# EAGLE board yellowstone-walach-aerospace-cubesat-brd (EAGLE 9.7.0)
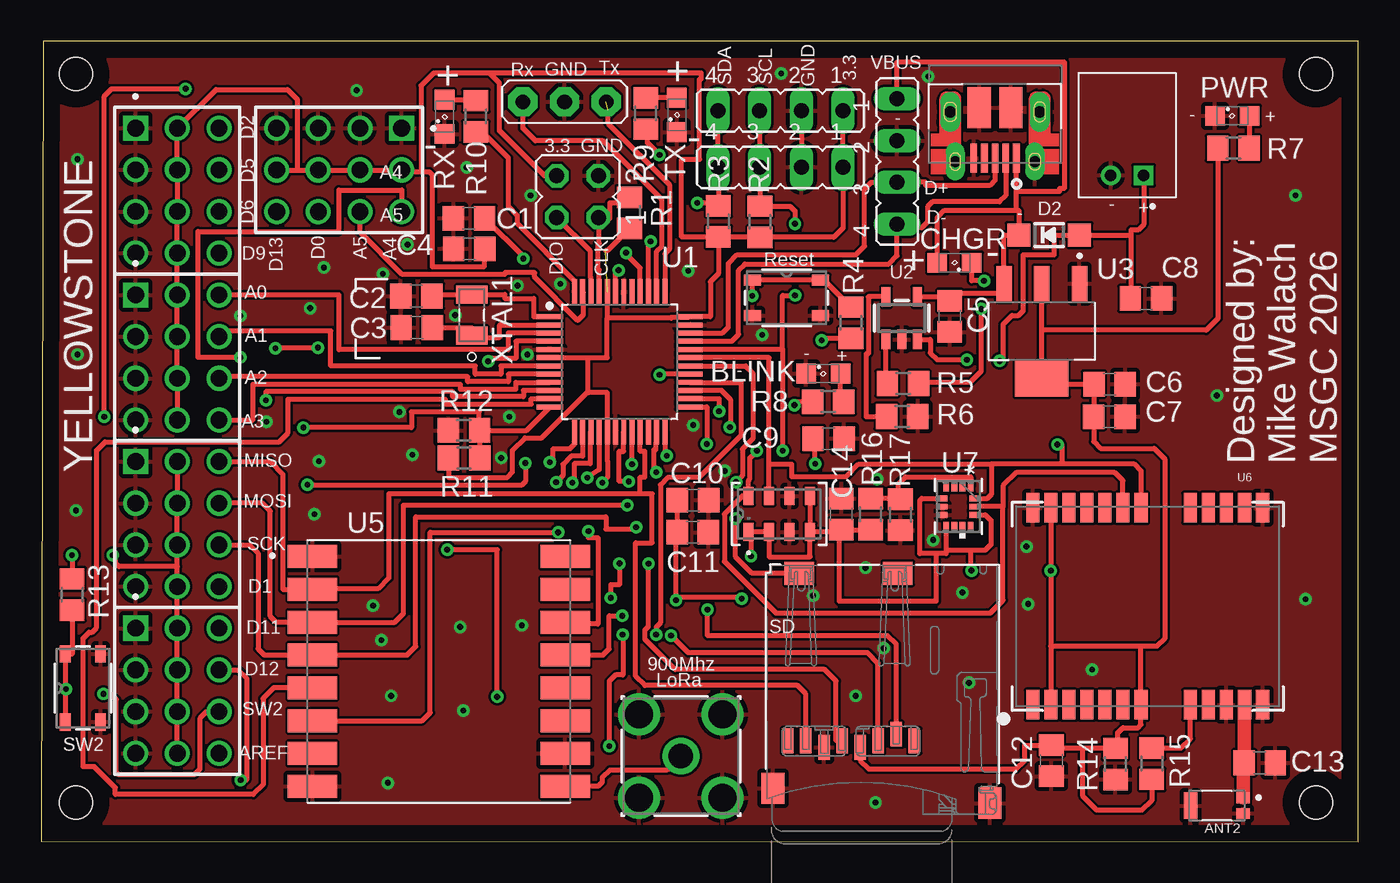
[diagram p0: board, top side]
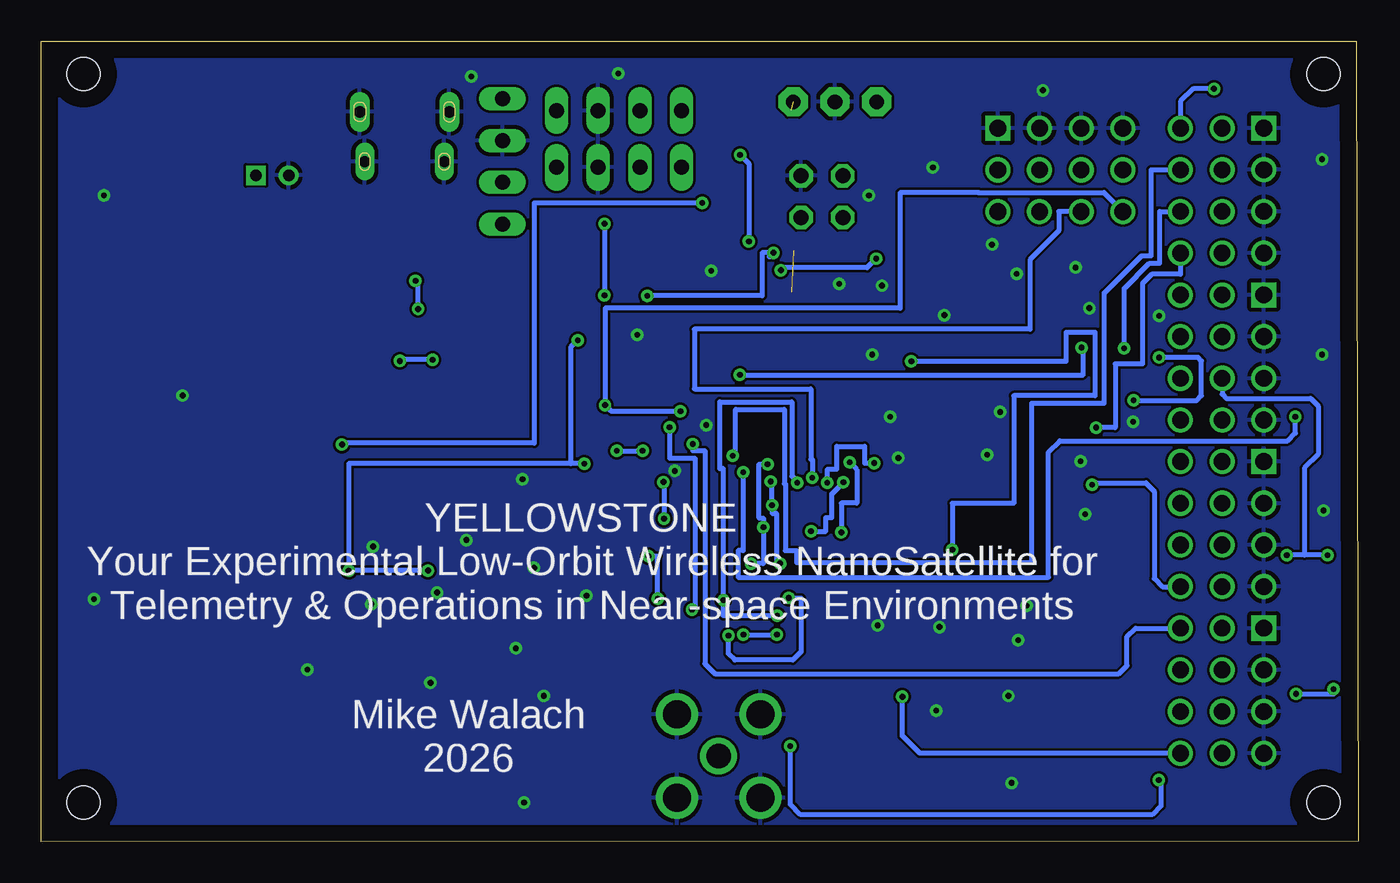
[diagram p1: board, bottom side, seen from below]

Size 80.25 x 48.8 mm. Coordinates in mm from the lower left corner, seen from the top.
Outline: 0,0.03 80.23,0 80.25,48.8 0.13,48.8 0,0.03
Copper layers (1*16): Top 0.035mm / dielectric 1.5mm / Bottom 0.035mm
Design rules "Fusion Electronics Design Rules": minimum track width 6mil, minimum drill 0.35mm, track to track 6mil, track to pad 6mil, pad to pad 6mil, via to via 6mil, smd to smd 6mil, copper to edge 40mil, drill to drill 6mil, minimum pad ring 10mil, minimum via ring 8mil, stop-mask expansion 4mil, vias tented up to drill 0mil, thermal gap 10mil
Holes 2 mm at 2.13,46.78 2.14,2.42 77.65,2.42 77.65,46.78

## Footprints (pad centres in the part's own frame; a part is rotated, then mirrored left to right if it is on the bottom)
XDCR_W3011 = smd 0.65 x 0.8: 1 -0.475,1.6; 2 0.475,1.6 | smd 1.6 x 0.8: 3 0,-1.6
132134_AMP = drill 1.499 pad 2.007: 1 0,0 | drill 1.702 pad 2.21: 2 -2.54,2.54; 3 -2.54,-2.54; 4 2.54,-2.54; 5 2.54,2.54
SML0805 = smd 1.2 x 1.2: A 1.05,0; C -1.05,0
C0805 = smd 1.3 x 1.5: 1 -0.95,0; 2 0.95,0
MICROBUILDER_SOD-123 = smd 1.4 x 1.4: A 1.85,0; C -1.85,0
TSW-104-07-F-T_SAMTEC_TSW-104-07-F-T = drill 1.02 pad 1.37 square: 01 -3.81,-2.54 | drill 1.02 pad 1.37: 02 -3.81,0; 03 -3.81,2.54; 04 -1.27,-2.54; 05 -1.27,0; 06 -1.27,2.54; 07 1.27,-2.54; 08 1.27,0; 09 1.27,2.54; 10 3.81,-2.54; 11 3.81,0; 12 3.81,2.54
S2B-PH-K-S(LF)(SN) = drill 0.7 square: 1 -1,0 | drill 0.7: 2 1,0
JP4 = drill 0.914 long: 1 -3.81,0; 2 -1.27,0; 3 1.27,0; 4 3.81,0
3-PIN-JUMPER = drill 0.9 pad 1.778 octagon: 1 0,2.54; 2 0,0; 3 0,-2.54
JP2Q = drill 0.914 octagon: 1 -1.27,-1.27; 2 -1.27,1.27; 3 1.27,-1.27; 4 1.27,1.27
10103594 = smd 0.4 x 1.75: 1 -1.3,2.825; 2 -0.65,2.825; 3 0,2.825; 4 0.65,2.825; 5 1.3,2.825 | smd 1.425 x 2.5: 6 -0.963,-0.25; 7 0.963,-0.25 | drill 0.65 pad 0.73 long: SH1 -2.425,3.03; SH2 2.425,3.03 | drill 0.7 long: SH3 -2.725,0; SH4 2.725,0
R0805 = smd 1.3 x 1.5: 1 -0.95,0; 2 0.95,0
MICROBUILDER_MICROSD = smd 0.7 x 1.5: 1 9,-10.64; 2 7.9,-10.24; 3 6.8,-10.64; 4 5.7,-11.04; 5 4.6,-10.64; 6 3.5,-11.04; 7 2.4,-10.64; 8 1.3,-10.64 | smd 1.8 x 1.4: CD1 2,-0.44; CD2 8,-0.44 | smd 1.4 x 1.9: MT1 0.4,-13.54; MT2 13.6,-14.44
PTS810 = smd 1.041 x 0.66: 1 -2.075,1.075; 2 2.075,1.075; 3 -2.075,-1.075; 4 2.075,-1.075
QFP50P900X900X120-48 = smd 1.6 x 0.3: 1 -4.25,2.75; 2 -4.25,2.25; 3 -4.25,1.75; 4 -4.25,1.25; 5 -4.25,0.75; 6 -4.25,0.25; 7 -4.25,-0.25; 8 -4.25,-0.75; 9 -4.25,-1.25; 10 -4.25,-1.75; 11 -4.25,-2.25; 12 -4.25,-2.75; 25 4.25,-2.75; 26 4.25,-2.25; 27 4.25,-1.75; 28 4.25,-1.25; 29 4.25,-0.75; 30 4.25,-0.25; 31 4.25,0.25; 32 4.25,0.75; 33 4.25,1.25; 34 4.25,1.75; 35 4.25,2.25; 36 4.25,2.75 | smd 0.3 x 1.6: 13 -2.75,-4.25; 14 -2.25,-4.25; 15 -1.75,-4.25; 16 -1.25,-4.25; 17 -0.75,-4.25; 18 -0.25,-4.25; 19 0.25,-4.25; 20 0.75,-4.25; 21 1.25,-4.25; 22 1.75,-4.25; 23 2.25,-4.25; 24 2.75,-4.25; 37 2.75,4.25; 38 2.25,4.25; 39 1.75,4.25; 40 1.25,4.25; 41 0.75,4.25; 42 0.25,4.25; 43 -0.25,4.25; 44 -0.75,4.25; 45 -1.25,4.25; 46 -1.75,4.25; 47 -2.25,4.25; 48 -2.75,4.25
MICROBUILDER_SOT23-5 = smd 0.55 x 1.2: 1 -0.95,-1.3; 2 0,-1.3; 3 0.95,-1.3; 4 0.95,1.3; 5 -0.95,1.3
VREG_TLV1117LV33DCYR = smd 2.15 x 0.95: 1 -2.9,2.3; 2 -2.9,0; 3 -2.9,-2.3 | smd 2.15 x 3.25: 4 2.9,0
SON8_MS5611_TEC = smd 1.092 x 0.61: 1 -1.1,1.875; 2 -1.1,0.625; 3 -1.1,-0.625; 4 -1.1,-1.875; 5 1.1,-1.875; 6 1.1,-0.625; 7 1.1,0.625; 8 1.1,1.875
XCVR_RFM95W-915S2 = smd 3 x 1.4: 1 -7.7,7; 2 -7.7,5; 3 -7.7,3; 4 -7.7,1; 5 -7.7,-1; 6 -7.7,-3; 7 -7.7,-5; 8 -7.7,-7; 9 7.7,-7; 10 7.7,-5; 11 7.7,-3; 12 7.7,-1; 13 7.7,1; 14 7.7,3; 15 7.7,5; 16 7.7,7
GPS_NEO-M9N = smd 1.8 x 0.8: 1 6,-7; 2 6,-5.9; 3 6,-4.8; 4 6,-3.7; 5 6,-2.6; 6 6,-1.5; 7 6,-0.4; 8 6,2.6; 9 6,3.7; 10 6,4.8; 11 6,5.9; 12 6,7; 13 -6,7; 14 -6,5.9; 15 -6,4.8; 16 -6,3.7; 17 -6,2.6; 18 -6,-0.4; 19 -6,-1.5; 20 -6,-2.6; 21 -6,-3.7; 22 -6,-4.8; 23 -6,-5.9; 24 -6,-7
LGA-14L_2P5X3X0P83_STM-L = smd 0.577 x 0.351: 1 -1.21,0.75; 2 -1.21,0.25; 3 -1.21,-0.25; 4 -1.21,-0.75; 8 1.21,-0.75; 9 1.21,-0.25; 10 1.21,0.25; 11 1.21,0.75 | smd 0.351 x 0.577: 5 -0.5,-0.956; 6 0,-0.956; 7 0.5,-0.956; 12 0.5,0.956; 13 0,0.956; 14 -0.5,0.956
XTAL_ABS07-32.768KHZ-T = smd 1.1 x 1.9: 1 -1.25,0; 2 1.25,0

## Placement (x,y rotation side)
ANT2  W3011  [XDCR_W3011]  71.62,2.22 270 top
ANT-1  132134132134_AMP  [132134_AMP]  38.98,5.23 0 top
BLINK  [SML0805]  47.66,28.54 0 top
C1  1uF  [C0805]  26.07,38 180 top
C2  22pF  [C0805]  22.86,33.26 180 top
C3  22pF  [C0805]  22.89,31.34 180 top
C4  1uF  [C0805]  26.08,36.14 180 top
C5  1uF  [C0805]  55.35,32.02 270 top
C6  1uF  [C0805]  65.09,27.89 0 top
C7  10uF  [C0805]  65.08,25.92 0 top
C8  10uF  [C0805]  67.31,33.11 0 top
C9  0.1uF  [C0805]  47.97,24.57 0 top
C10  0.1uF  [C0805]  39.72,20.83 0 top
C11  10uF  [C0805]  39.7,18.87 0 top
C12  0.1uF  [C0805]  61.55,4.96 270 top
C13  2.2pF  [C0805]  74.24,4.82 0 top
C14  0.1uF  [C0805]  48.74,19.97 90 top
CHGR  [SML0805]  55.65,35.28 180 top
D2  [MICROBUILDER_SOD-123]  61.41,36.98 0 top
J1  3X4_MALE_HEADER  [TSW-104-07-F-T_SAMTEC_TSW-104-07-F-T]  8.3,29.52 270 top
J2  3X4_MALE_HEADER  [TSW-104-07-F-T_SAMTEC_TSW-104-07-F-T]  18.16,40.95 180 top
J3  S2B-PH-K-S(LF)(SN)  [S2B-PH-K-S(LF)(SN)]  66.17,40.62 180 top
J4  3X4_MALE_HEADER  [TSW-104-07-F-T_SAMTEC_TSW-104-07-F-T]  8.3,19.37 270 top
J5  3X4_MALE_HEADER  [TSW-104-07-F-T_SAMTEC_TSW-104-07-F-T]  8.3,39.68 270 top
J6  3X4_MALE_HEADER  [TSW-104-07-F-T_SAMTEC_TSW-104-07-F-T]  8.3,9.22 270 top
JP2  [JP4]  45.05,44.56 180 top
JP3  [JP4]  45.05,41.11 180 top
JP4  [JP4]  52.15,41.46 270 top
JP5  3-PIN-JUMPER  [3-PIN-JUMPER]  31.89,45.09 270 top
JP6  [JP2Q]  32.69,39.32 90 top
MICRO-USB-B  10103594  [10103594]  58.11,44.48 180 top
PWR  [SML0805]  72.57,44.24 0 top
R1  1K  [R0805]  35.85,38.33 90 top
R2  10K  [R0805]  43.8,37.79 270 top
R3  10K  [R0805]  41.26,37.81 270 top
R4  1K  [R0805]  49.33,31.64 270 top
R5  1K  [R0805]  52.51,27.93 0 top
R6  10K  [R0805]  52.45,25.92 0 top
R7  2.2K  [R0805]  72.64,42.27 0 top
R8  2.2K  [R0805]  47.96,26.83 0 top
R9  2.2K  [R0805]  36.83,44.38 90 top
R10  2.2K  [R0805]  26.49,44.21 90 top
R11  2.2K  [R0805]  25.77,23.4 0 top
R12  2.2K  [R0805]  25.77,25.08 180 top
R13  1K  [R0805]  1.89,15.08 90 top
R14  100K  [R0805]  65.45,4.76 90 top
R15  1K  [R0805]  67.66,4.77 270 top
R16  1K  [R0805]  50.53,19.97 270 top
R17  1K  [R0805]  52.35,19.94 90 top
RX  [SML0805]  24.59,44.18 90 top
SD  [MICROBUILDER_MICROSD]  44.19,16.81 0 top
SW1  PTS810SJG250SMTRLFSPTS810  [PTS810]  45.42,33.15 0 top
SW2  PTS810SJG250SMTRLFSPTS810  [PTS810]  2.55,9.38 90 top
TX  [SML0805]  38.73,44.3 90 top
U1  ATSAMD21G  [QFP50P900X900X120-48]  35.25,29.26 0 top
U2  [MICROBUILDER_SOT23-5]  52.43,31.92 0 top
U3  TLV1117LV33DCYR  [VREG_TLV1117LV33DCYR]  60.96,31.11 270 top
U4  MS560702BA03-50SON8_MS5611_TEC  [SON8_MS5611_TEC]  44.97,19.98 90 top
U5  RFM95W-915S2  [XCVR_RFM95W-915S2]  24.23,10.39 0 top
U6  GPS_U-BLOX_NEO-M9N  [GPS_NEO-M9N]  67.41,14.36 270 top
U7  LSM6DSO32TRLGA-14L_2P5X3X0P83_STM-L  [LGA-14L_2P5X3X0P83_STM-L]  55.88,20.43 270 top
XTAL1  32.768kHz  [XTAL_ABS07-32.768KHZ-T]  26.24,32.1 90 top

## Library data of the parts
ANT2 = W3011; MANUFACTURER: PulseLarsen; MAXIMUM_PACKAGE_HEIGHT: 1.3 mm; PARTREV: N/A; STANDARD: Manufacturer recommendations
ANT-1 = 2025-03-19_02-22-58_Library; COPYRIGHT: Copyright (C) 2025 Ultra Librarian. All rights reserved.; MANUFACTURER_PART_NUMBER: 132134; MFR_NAME: Amphenol ICC
BLINK CHGR PWR RX TX = led
C1-C14 = rcl; SPICEPREFIX: C
D2 SD U2 = flightcomputer-2023
J1 J2 J4-J6 = BOBCAT_Library; MANUFACTURER: Samtec; PARTREV: R; STANDARD: Manufacturer Recommendations
J3 = Connectors; CREATED_BY: PCBLayout.com; DIGI_KEY_PART_NUMBER: 455-1719-ND; MANUFACTURER: JST Sales America Inc.; MPN: S2B-PH-K-S(LF)(SN)
JP2-JP4 JP6 = jumper
JP5 = walach
MICRO-USB-B = Connector_USB; CATEGORY: Connectors; CONTACTS: 5; CURRENT-RATING: 1.8A; DESCRIPTION: CONN RCPT USB2.0 MICRO B SMD R/A; GENDER: Receptacle; MANUFACTURER: Amphenol ICC (FCI); MOUNT_TYPE: R/A; MPN: 10103594-0001LF; OPERATING_TEMPERATURE: -30°C ~ 80°C; PART_STATUS: ACTIVE; ROHS_COMPLIANT: COMPLIANT; SUB_CATEGORY: USB; TYPE: USB-micro B; VOLTAGE-RATING: 100VAC
R1-R17 = rcl; SPICEPREFIX: R
SW1 SW2 = 2024-06-17_17-27-14_Library; COPYRIGHT: Copyright (C) 2024 Ultra Librarian. All rights reserved.; MANUFACTURER_PART_NUMBER: PTS810SJG250SMTRLFS; MFR_NAME: C&K Components
U1 = IC_Embedded; CATEGORY: IC_Embedded; CORE: ARM Cortex M0+; DESCRIPTION: Low-power, high-performance Microchip's ARM® Cortex®-M0+ based flash microcontroller; MANUFACTURER: Microchip Technology; MPN: ATSAMD21G; OPERATING_TEMP: variable; PACKAGE: TQFP-48; PART_STATUS: Active; ROHS_COMPLIANT: COMPLIANT; SERIES: SAM D21G; SUB-CATEGORY: Microcontroller; TYPE: 32 bit Microcontroller
U3 = TLV1117LV33DCYR; MANUFACTURER: Texas Instruments; MAXIMUM_PACKAGE_HEIGHT: 1.80 mm; PARTREV: B; STANDARD: IPC-7351B
U4 = 2025-03-19_19-02-07_Library; COPYRIGHT: Copyright (C) 2025 Ultra Librarian. All rights reserved.; MANUFACTURER_PART_NUMBER: MS560702BA03-50; MFR_NAME: TE Connectivity
U5 = RFM95W-915S2; AVAILABILITY: In Stock; CHECK_PRICES: https://www.snapeda.com/parts/RFM95W-915S2/RF/view-part/?ref=eda; DESCRIPTION: 802.15.4 LoRa™ Transceiver Module 915MHz Antenna Not Included Surface Mount; MF: RF Solutions; MP: RFM95W-915S2; PACKAGE: Non Standard RF Solutions; PRICE: None; PURCHASE-URL: https://www.snapeda.com/api/url_track_click_mouser/?unipart_id=585488&manufacturer=RF Solutions&part_name=RFM95W-915S2&search_term=None; SNAPEDA_LINK: https://www.snapeda.com/parts/RFM95W-915S2/RF/view-part/?ref=snap
U6 = SparkFun GPS NEO_M9N_ANT; PROD_ID: IC-14651
U7 = 2023-12-05_15-44-33_Library; COPYRIGHT: Copyright (C) 2023 Ultra Librarian. All rights reserved.; MANUFACTURER_PART_NUMBER: LSM6DSO32TR; MFR_NAME: STMicroelectronics
XTAL1 = Crystal-WA; CATEGORY: Crystal; MANUFACTURER: Abracon LLC; MPN: ABS07-32.768KHZ-T; OPERATING_TEMPERATURE: -40°C ~ 85°C; PART_STATUS: ACTIVE; ROHS_COMPLIANT: COMPLIANT; SERIES: ABS07; SUB_CATEGORY: Crystal Surface Mount; TYPE: Crystal

## Nets
+3V3: C4.1 C6.1 C7.1 C9.1 C10.1 C11.1 C12.1 C14.1 J1.02 J1.05 J1.08 J1.11 J2.02 J2.05 J2.08 J2.11 J4.02 J4.05 J4.08 J4.11 J5.02 J5.05 J5.08 J5.11 J6.02 J6.05 J6.08 J6.11 JP2.1 JP3.1 JP6.4 R1.1 R2.2 R3.2 R4.2 R7.1 R11.1 R13.2 R14.2 R15.2 R16.2 SD.4 U1.6 U1.17 U1.36 U1.44 U3.2 U3.4 U4.1 U4.2 U4.4 U4.5 U5.13 U6.2 U6.7 U6.23 U7.5 U7.8 U7.12
A0: J1.03 U1.3
A1: J1.06 U1.7
A2: J1.09 U1.8
A3: J1.12 U1.9
A4: J2.03 U1.10
A5: J2.06 U1.47
AREF: J6.12 U1.4
D0: J2.09 U1.16
D1: J4.12 U1.15
D2: J5.03 U1.23
D5: J5.06 U1.24
D6: J5.09 U1.29
D7: SD.CD1 U1.30
D9: J5.12 R11.2 R12.1 U1.12
D11: J6.03 U1.25
D12: J6.06 U1.28
D13: J2.12 R8.1 U1.26
D+: JP4.3 MICRO-USB-B.3 U1.34
D-: JP4.4 MICRO-USB-B.2 U1.33
DIO0: U1.14 U5.14
DIO1: U5.15
DIO2: U5.16
DIO3: U5.11
DIO4: U5.12
DIO5: U5.7
GND: ANT2.2 ANT2.3 ANT-1.2 ANT-1.3 ANT-1.4 ANT-1.5 BLINK.C C1.2 C2.2 C3.2 C4.2 C5.2 C6.2 C7.2 C8.2 C9.2 C10.2 C11.2 C12.2 C13.2 C14.2 J1.01 J1.04 J1.07 J1.10 J2.01 J2.04 J2.07 J2.10 J3.2 J4.01 J4.04 J4.07 J4.10 J5.01 J5.04 J5.07 J5.10 J6.01 J6.04 J6.07 J6.10 JP2.2 JP3.2 JP4.2 JP5.2 JP6.3 MICRO-USB-B.5 MICRO-USB-B.6 MICRO-USB-B.7 MICRO-USB-B.SH1 MICRO-USB-B.SH2 MICRO-USB-B.SH3 MICRO-USB-B.SH4 PWR.C R6.2 R12.2 R14.1 R17.1 RX.C SD.6 SD.MT1 SD.MT2 SW1.3 SW1.4 SW2.3 SW2.4 TX.C U1.5 U1.18 U1.35 U1.42 U2.2 U3.1 U4.3 U4.6 U5.1 U5.8 U5.10 U6.10 U6.12 U6.13 U6.24 U7.6 U7.7
GPS_ANT1: ANT2.1 C13.1 U6.11
LORA_ANT: ANT-1.1 U5.9
LORA_RESET: U1.13 U5.6
MISO: J4.03 SD.7 U1.21 U5.2
MOSI: J4.06 SD.3 U1.19 U5.3
N$2: C1.1 U1.43
N$4: R5.1 U2.1
N$6: CHGR.C R5.2
N$7: R6.1 U2.5
N$8: BLINK.A R8.2
N$9: R9.2 TX.A
N$10: R10.2 RX.A
N$11: R15.1 U6.8
N$12: C3.1 U1.2 XTAL1.1
N$14: R16.1 R17.2 U7.1
N$15: C2.1 U1.1 XTAL1.2
N$30: PWR.A R7.2
NSS: U1.11 U5.5
RESET: R4.1 SW1.1 SW1.2 U1.40
RXD: JP5.3 U1.38
RXLED: R10.1 U1.48
SCK: J4.09 SD.5 U1.20 U5.4
SCL: JP2.3 JP3.3 R2.1 U1.32 U4.8 U6.19 U7.13
SD_CS: SD.2 U1.27
SDA: JP2.4 JP3.4 R3.1 U1.31 U4.7 U6.18 U7.14
SW2: J6.09 R13.1 SW2.1 SW2.2
SWCLK: JP6.1 R1.2 U1.45
SWDIO: JP6.2 U1.46
TXD: JP5.1 U1.37
TXLED: R9.1 U1.39
V-BACKUP: U6.22
VBAT: C8.1 D2.A J3.1 U2.3
VBUS: C5.1 CHGR.A D2.C JP4.1 MICRO-USB-B.1 U2.4 U3.3

## Tracks (layer width: path | path; a pad name or v marks a point on that pad's centre or on a via)
+3V3  (via drill 0.35)  (1 unrouted)
  Top 0.305: R1.1 34.5,36.02 34.4,36.02 | U4.5 U4.4 | U4.4 46.84,17.37 44.34,17.37 U4.2 U4.1 43.25,18.88 v43.25,17.4 | C14.1 48.74,18.79 | 34.5,23.22 U1.17 34.5,27.38 33.33,27.38 | 34.5,23.22 | U1.6 33.33,29.51 | 33.33,29.51 34.48,29.51 34.48,31.91 34.5,31.91 | JP2.1 JP3.1 48.86,37.41 48.29,36.84 R2.2 43.8,36.86 R3.2 | 60.96,31.19 U3.4 60.96,27.89 C6.1 64.14,25.92 C7.1 64.13,24.4 64.54,23.99 67.81,23.99 68.45,23.35 68.45,12.38 67.98,11.92 67.01,11.92 | 60.96,31.19 U3.2 | U6.23 v61.51,16.52 61.51,11.92 | 61.51,11.92 U6.2 | 67.01,11.92 U6.7 67.01,7.14 66.83,6.96 65.91,6.96 65.59,6.65 65.59,5.71 R14.2 63.47,5.71 | 67.01,11.92 61.51,11.92 | 63.47,5.71 61.78,5.71 | 61.78,5.71 61.55,5.71 C12.1 | U7.8 55.13,17.77 | 55.13,17.77 55.13,17.57 54.52,17.57 | 54.52,17.57 53.52,17.57 53.52,20.8 53.66,20.93 U7.5 | 54.52,17.57 54.52,14.67 48.63,14.67 48.63,19.02 C14.1 | U7.12 57.52,19.93 57.86,19.59 57.86,18.13 57.5,17.77 56.61,17.77 | 56.61,17.77 55.13,17.77 | R16.2 C14.1 | C14.1 48.74,18.88 U4.4 | SD.4 49.89,4.99 50.43,4.45 59.39,4.45 59.92,4.99 59.92,5.9 61.78,5.9 61.78,5.71 | C10.1 38.77,18.89 C11.1 38.68,18.87 v38.68,14.73 38.68,14.94 42.69,14.94 v42.69,14.83 | J6.11 J6.08 J6.05 J6.02 J4.11 8.3,16.79 | 8.3,16.79 J4.08 J4.05 J4.02 | J1.11 J1.08 J1.05 J1.02 J5.11 J5.08 J5.05 J5.02 10.65,45.85 15.01,45.85 15.6,45.25 15.6,40.95 | J2.11 15.6,40.95 | 15.6,40.95 J2.08 J2.05 J2.02 22.09,40.82 23.14,40.82 | JP6.4 30.66,40.59 27.92,43.33 27.92,46.24 27.31,46.85 | 27.31,46.85 23.91,46.85 23.14,46.08 23.14,40.82 | C4.1 26.98,36.09 26.98,35.03 23.85,35.03 23.85,40.64 23.66,40.82 23.14,40.82 | U5.13 34.24,11.39 34.61,11.76 34.61,13.78 v35.41,13.78
  Top 0.305: v1.88,17.48 v1.89,17.48 R13.2 | R7.1 71.69,31.9 70.97,31.19 60.96,31.19 | R3.2 41.26,34.62 40.77,34.13 40.77,32.01 U1.36 39.45,31.96 38.39,31.96 38.39,31.91 34.5,31.91 | 56.61,17.77 56.61,16.54 v56.68,16.54 | R4.2 47.56,30.69 v47.56,30.57 | v47.16,23.05 47.16,24.57 C9.1 | R15.2 67.66,2.52 67.07,1.93 64.31,1.93 63.47,2.77 63.47,5.71 | R11.1 24.82,22.22 28.41,22.22 28.72,22.54 28.72,23.87 29.48,24.62 30.5,24.62 33.25,27.38 33.33,27.38 | 33.33,27.38 33.33,29.51 | 34.5,23.22 34.5,22.2 v34.18,21.89 | v4.37,17.48 4.54,17.48 4.54,16.98 4.73,16.79 8.3,16.79 | R3.2 39.03,36.86 39.03,41.6 40.12,41.6 40.12,46.49 40.23,46.49 40.23,46.85 27.31,46.85 | 34.5,31.91 U1.44
  Bottom 0.305: v35.41,13.78 38.68,13.78 v38.68,14.73 38.68,22.75 38.9,22.75 38.9,26.81 34.52,26.81 34.52,22.29 34.18,21.95 v34.18,21.89 | v42.69,14.83 42.69,17.4 v43.25,17.4 | v56.68,16.54 61.51,16.54 | 61.51,16.54 v61.51,16.52 | v47.56,30.57 47.98,30.15 47.98,23.05 | v47.16,23.05 47.98,23.05 | 47.98,23.05 61.51,23.05 61.51,16.54 | v1.88,17.48 3.3,17.48 | 3.3,17.48 v4.37,17.48 | J1.08 8.3,27.28 8.05,27.03 2.91,27.03 2.46,26.57 2.46,23.62 3.3,22.78 3.3,17.48
A0
  Top 0.305: U1.3 28.46,31.01 28.46,29.99 18.15,29.99 18.15,33.33 J1.03
A1
  Top 0.305: J1.06 10.84,31.13 17.65,31.13 17.65,29.01 26.45,29.01 26.45,28.5 28.02,28.5 28.02,29.01 U1.7
A2
  Top 0.305: U1.8 28.48,28.51 28.48,28.05 25.99,28.05 25.99,28.35 10.84,28.35 J1.09
A3
  Top 0.305: J1.12 12.91,25.71 12.91,27.89 25.54,27.89 25.54,27.59 28.94,27.59 28.94,28.01 U1.9
A4  (via drill 0.35)
  Top 0.305: v13.7,26.91 13.7,27.44 25.08,27.44 25.08,27.13 29.39,27.13 29.39,27.51 U1.10 | v12.15,29.52 9.56,29.52 9.56,37.2 18.14,37.2 18.14,39.72 21.97,39.72 J2.03
  Bottom 0.305: v13.7,26.91 9.84,26.91 9.56,27.19 9.56,29.31 9.77,29.52 v12.15,29.52
A5
  Top 0.305: U1.47 33.02,33.48 33.02,32.1 32.7,31.78 30.07,34.41 30.07,34.68 28.24,34.68 28.24,34.57 22,34.57 19.43,37.15 J2.06
AREF  (via drill 0.35)
  Top 0.305: U1.4 28.92,30.51 28.92,29.46 27.24,29.46 v27.24,29.29 | v27.79,8.85 27.79,17.8 v24.74,17.8
  Bottom 0.305: J6.12 26.73,5.4 27.79,6.46 v27.79,8.85 | v24.74,17.8 24.74,20.63 21,20.63 21,27.2 16.05,27.2 16.05,31.06 17.8,31.06 17.8,29.29 v27.24,29.29
D0  (via drill 0.35)
  Top 0.305: U1.16 34,22.67 33.95,22.67 v33.27,22.2
  Bottom 0.305: J2.09 18.26,38.41 18.26,37.23 20.01,35.48 20.01,31.24 40.46,31.24 40.46,27.61 33.36,27.61 33.36,23.31 33.27,23.31 v33.27,22.2
D1  (via drill 0.35)
  Top 0.305: v16.23,21.76 16.26,21.73 17.73,21.73 29.26,21.73 29.5,21.97 v29.5,23.08 | U1.15 33.46,24.96 33.46,23.06 32.48,23.06 32.48,22 v32.37,21.89
  Bottom 0.305: v16.23,21.76 16.23,21.88 12.95,21.88 12.44,21.37 12.44,16.04 11.94,15.54 10.84,15.54 J4.12 | v29.5,23.08 30.09,23.08 30.09,24.1 31.78,24.1 31.78,22.71 32.34,22.71 32.34,22.04 32.37,22 v32.37,21.89
D2  (via drill 0.35)
  Top 0.305: v3.85,25.9 3.86,25.9 3.86,45.45 4.3,45.89 v8.81,45.89 | U1.23 37.5,24.32 37.45,24.32 37.45,23.9 37.33,23.9 37.33,22.75 37.48,22.75 v37.48,22.52
  Bottom 0.305: v3.85,25.9 3.85,24.91 4.31,24.44 18.19,24.44 18.87,23.76 18.87,16.12 37.8,16.12 37.8,17.76 37.48,17.76 v37.48,22.52 | v8.81,45.89 10.07,45.89 10.84,45.12 J5.03
D5  (via drill 0.35)
  Top 0.305: U1.24 38,23.53 v38.12,23.53
  Bottom 0.305: v38.12,23.53 37.94,23.53 37.94,26.35 34.98,26.35 34.98,21.83 34.91,21.83 34.91,17.75 34.22,17.75 34.22,17.02 19.9,17.02 19.9,26.74 15.48,26.74 15.48,33.45 13.2,35.73 12.62,35.73 12.62,40.95 J5.06
D6  (via drill 0.35)
  Top 0.305: U1.29 37.68,28.51 v37.68,28.46 | v16.86,30.12 14.27,30.12 v14.27,30.08
  Bottom 0.305: J5.09 12.1,38.41 12.1,35.26 12.73,35.26 14.27,33.73 v14.27,30.08 | v37.68,28.46 16.77,28.46 16.77,30.12 v16.86,30.12
D7  (via drill 0.35)
  Top 0.305: U1.30 42.92,29.01 43.36,28.57 43.36,24.58 42.72,23.94 42.72,22.31 v42.34,21.93 | SD.CD1 43.32,16.37 42.3,17.38 v42.3,19.7
  Bottom 0.305: v42.34,21.93 42.34,21.76 42.3,21.72 v42.3,19.7
D9  (via drill 0.35)
  Top 0.305: R11.2 R12.1 | U1.12 29.57,25.08 R12.1 | R12.1 26.68,25.08 26.68,26.21 22.57,26.21 22.57,25.25 v15.98,25.25
  Bottom 0.305: v15.98,25.25 14.81,25.25 14.81,29.12 13.15,29.12 13.15,34.02 12.58,34.6 10.84,34.6 J5.12
D11  (via drill 0.35)
  Top 0.305: U1.25 40.56,26.51 v40.56,24.25
  Bottom 0.305: J6.03 13.59,13.03 14.1,12.51 14.1,10.74 14.6,10.24 39.2,10.24 39.81,10.86 39.81,23.85 40.56,23.85 v40.56,24.25
D12  (via drill 0.35)
  Top 0.305: U1.28 42.65,28.01 42.65,24.78 40.08,22.2 38.17,22.2 37.73,21.76 37.73,13.35 37.47,13.09 v37.47,12.63 | J6.06 12.02,10.49 12.51,9.99 12.51,3.78 v12.16,3.78 | v34.62,5.85 34.62,9.8 34.99,10.18 35.44,10.18 35.44,12.62 v35.43,12.63
  Bottom 0.305: v37.47,12.63 v35.43,12.63 | v12.16,3.78 12.03,3.78 12.03,2.2 12.56,1.66 33.99,1.66 34.62,2.29 v34.62,5.85
D13  (via drill 0.35)
  Top 0.305: 47.01,26.92 R8.1 46.1,26.83 v45.89,26.62 | U1.26 41.3,27.01 v41.3,26.25
  Bottom 0.305: v41.3,26.25 45.52,26.25 v45.89,26.62 45.89,32.52 27.92,32.52 27.92,39.55 23.14,39.55 23.14,39.58 15.5,39.58 15.5,39.56 J2.12
D+
  Top 0.305: U1.34 41.5,31.01 41.87,31.37 41.87,35.24 42.4,35.77 49.64,35.77 50.16,36.3 50.16,39.77 50.58,40.19 JP4.3 52.23,40.19 53.9,40.19 53.9,39.99 57.79,39.99 58.12,40.32 MICRO-USB-B.3
D-
  Top 0.305: U1.33 42.08,30.51 42.5,30.92 42.5,34.84 42.87,35.21 51.64,35.21 52.15,35.72 52.15,37.42 | MICRO-USB-B.2 58.77,39.38 58.39,39.01 54.31,39.01 54,38.7 54,37.77 53.65,37.42 52.15,37.42 | 52.15,37.42 JP4.4
DIO0  (via drill 0.35)
  Top 0.305: v33.35,18.93 33.35,18.55 33.92,18.55 33.92,13.27 31.93,13.27 U5.14 | U1.14 33,23.52 32.29,23.52 31.79,23.01 31.79,22.32 v31.38,21.91
  Bottom 0.305: v33.35,18.93 32.45,18.93 32.45,19.76 32.08,19.76 32.08,21.21 31.68,21.61 v31.38,21.91
GND  (via drill 0.35)
  Top 0.305: JP2.2 JP3.2
  other vias: 22.33,36.4 17.23,35 22.63,23.6 25.73,8 25.53,13.1 2.13,20.2 50.83,2.4 20.81,34.62 29.83,39.4 19.23,45.8 25.93,41.1 25.23,32.1 31.63,34 28.53,25.9 28.03,23.4 21.83,26.2 16.39,32.53 13.73,25.6 29.63,29.7 50.23,16.7 47.03,15 56.13,15.2 50.93,22.1 60.03,18 60.13,14.5 54.34,18.4 64.03,10.5 49.63,8.9 51.33,11.8 56.53,9.7 77.03,14.8 71.63,27.2 76.43,39.4 2.23,41.6 2.23,29.7 20.23,14.4 20.73,12.3 21.33,8.9 21.13,3.6 39.43,34.8 39.73,25.4 43.93,30.9 29.03,33.9 12.14,32.06 16.65,19.97 16.92,23.2 29.28,13.2 45.09,46.83 54.04,46.64 41.65,22.61
  pour Top: -1.2,-3.22 81.45,-3.22 81.45,50.02 -1.2,50.02
  pour Bottom: -1.1,-3.42 81.55,-3.42 81.55,50.32 -1.1,50.32 -1.1,50.32 -1.1,50.32 -1.1,50.32 -1.1,50.3 -1.1,50.29 -1.1,50.29
GPS_ANT1
  Top 0.813: U6.11 73.31,4.82 C13.1 73.23,4.82 ANT2.1
LORA_ANT
  Top 0.305: ANT-1.1 38.12,4.38 34.65,4.38 34.19,3.92 34.19,3.65 33.93,3.39 U5.9
LORA_RESET  (via drill 0.35)
  Top 0.305: U5.6 23.23,7.39 23.7,7.87 23.7,18.86 v31.5,18.86 | U1.13 32.5,24.23 32.24,23.97 31.19,23.97 31.19,23.33 v31,23.13
  Bottom 0.305: v31,23.13 30.55,22.69 30.55,20.65 31.5,20.65 v31.5,18.86
MISO
  Top 0.305: 36.5,21.21 21.18,21.21 21.18,16.08 20.52,15.42 16.56,15.42 U5.2 14.73,15.39 14.73,22.4 13.95,23.18 J4.03 | 36.5,21.21 36.5,22.23 36.78,22.23 36.78,23.8 36.5,23.8 U1.21 | SD.7 46.59,9.02 46.08,9.53 36.79,9.53 36.22,10.11 36.22,18.23 37.23,18.23 37.23,21.22 37.02,21.22 37.02,21.21 36.5,21.21
MOSI  (via drill 0.35)
  Top 0.305: J4.06 13.48,20.65 13.97,20.16 13.97,13.75 14.33,13.39 U5.3 21.55,13.39 22.08,13.92 22.08,20.52 v35.72,20.52 | U1.19 35.5,23.8 35.21,23.8 35.21,21.98 35.79,21.98 v35.8,21.96 | SD.3 50.99,10.89 50.36,11.52 39.43,11.52 v38.38,12.58 | v35.23,16.97 35.23,15.67 34.7,15.67 v34.7,14.87
  Bottom 0.305: v35.8,21.96 35.72,21.96 v35.72,20.52 35.72,20.02 35.46,20.02 35.46,16.97 v35.23,16.97 | v34.7,14.87 34.7,14.86 33.95,14.86 33.95,11.59 34.45,11.08 37.99,11.08 38.38,11.47 v38.38,12.58
N$2  (via drill 0.35)
  Top 0.305: U1.43 35,34.74 35.18,34.74 v35.18,34.84 | C1.1 27.02,38.02 29.38,35.66 v29.38,35.55
  Bottom 0.305: v35.18,34.84 35.04,34.98 29.94,34.98 v29.38,35.55
N$4
  Top 0.305: R5.1 51.48,27.93 U2.1
N$6  (via drill 0.35)
  Top 0.305: R5.2 53.46,28.04 56.63,28.04 57.28,28.69 v57.28,32.48 | v57.44,34.19 56.7,34.19 CHGR.C
  Bottom 0.305: v57.28,32.48 57.28,34.19 v57.44,34.19
N$7
  Top 0.305: U2.5 50.39,33.22 50.39,29.73 50.26,29.73 50.26,25.92 R6.1
N$8
  Top 0.305: R8.2 48.71,26.83 BLINK.A
N$9
  Top 0.305: TX.A 38.72,45.33 R9.2
N$10
  Top 0.305: RX.A 26.42,45.23 R10.2
N$11
  Top 0.305: R15.1 69.44,5.72 70.01,6.29 U6.8
N$12
  Top 0.305: U1.2 27.94,31.51 27.94,30.74 26.24,30.74 XTAL1.1 26.24,31.34 C3.1
N$14
  Top 0.305: R16.1 52.35,20.92 R17.2 52.23,20.89 52.23,21.83 52.65,22.25 56.63,22.25 U7.1
N$15
  Top 0.305: U1.1 30.01,32.01 30.01,33.12 28.24,33.12 28.24,33.35 XTAL1.2 | XTAL1.2 | C2.1 23.81,33.35 XTAL1.2
N$30
  Top 0.305: PWR.A 73.62,42.27 R7.2
NSS
  Top 0.305: U5.5 14.18,9.39 13.53,8.74 13.53,3.48 12.93,2.89 4.52,2.89 4.52,3.31 3.25,4.58 2.56,4.58 2.56,12.42 2.92,12.78 3.12,12.78 3.39,13.05 3.39,23.86 3.9,24.38 14.51,24.38 15.05,24.92 15.05,26.98 24.62,26.98 24.62,26.68 29.85,26.68 29.85,27.01 U1.11
RESET  (via drill 0.35)
  Top 0.305: U1.40 36.5,34.97 35.64,35.83 v35.64,35.9 | SW1.1 SW1.2 47.7,34.22 R4.1 | SW1.1 43.24,34.32 | v43.32,33.28 43.32,34.22 SW1.1
  Bottom 0.305: 35.9,35.64 v35.64,35.9 36.33,35.9 36.33,33.28 v43.32,33.28
RXD
  Top 0.305: JP5.3 29.35,43.48 30.11,42.71 34.25,42.71 37.82,39.15 37.82,36.31 37.5,35.99 U1.38
RXLED
  Top 0.305: R10.1 26.88,43.26 28.48,41.67 28.48,38.73 29.02,38.18 29.02,37.66 32.5,34.19 U1.48
SCK  (via drill 0.35)
  Top 0.305: J4.09 12.72,18.1 13.22,17.6 13.22,11.78 13.6,11.39 U5.4 22.31,11.39 22.82,11.91 22.82,19.8 34.42,19.8 34.42,19.06 36.25,19.06 v36.25,19.17 | v36,23.02 | v36,23.02 U1.20 | SD.5 48.43,6.17 48.43,9.81 47.74,10.5 38.63,10.5 36.79,12.35 36.79,12.91 37.01,13.13 v37.01,16.96
  Bottom 0.305: v36,23.02 36.51,23.02 36.51,19.73 36.25,19.73 v36.25,19.17 36.25,16.96 v37.01,16.96
SCL  (via drill 0.35)
  Top 0.305: U6.19 65.91,22.01 65.41,22.51 59.4,22.51 58.6,21.71 58.6,20.43 | 58.6,20.43 U7.13 | 58.6,20.43 58.6,14.72 57.82,13.94 44.76,13.94 41.62,17.08 41.62,19.98 42.73,21.08 U4.8 43.09,22.04 43.17,22.12 43.17,23.4 v43.61,23.83 | 45.18,30.01 U1.32 | 45.18,30.01 v45.18,23.83 | JP2.3 JP3.3 43.8,41.11 R2.1 | 45.18,30.01 45.18,33.3 v45.93,33.3 | R2.1 43.8,38.63 | R2.1 45.62,38.74 45.93,38.44 v45.93,37.67
  Bottom 0.305: v45.18,23.83 v43.61,23.83 | v45.93,37.67 v45.93,37.66 v45.93,33.3
SD_CS  (via drill 0.35)
  Top 0.305: SD.2 52.09,12.05 51.57,12.57 40.6,12.57 v40.6,14.16 | U1.27 41.45,27.51 41.99,26.97 41.99,25.29 v41.97,25.26
  Bottom 0.305: v41.97,25.26 41.97,23.39 40.43,23.39 40.43,14.33 v40.6,14.16
SDA  (via drill 0.35)
  Top 0.305: U7.14 57.65,20.93 57.92,21.2 57.92,23.02 | 57.92,23.02 57.92,23.05 62.19,23.05 | 62.19,23.05 66.56,23.05 67.01,22.6 U6.18 | U1.31 44.34,29.51 44.34,23.02 | U4.7 44.34,23.02 | JP2.4 JP3.4 41.26,41.11 R3.1 41.26,38.94 v39.97,38.94 | 44.34,23.02 45.72,23.02 45.72,22.27 49.05,22.27 49.81,23.02 57.92,23.02 | v61.92,24.21 62.19,24.21 62.19,23.05
  Bottom 0.305: v61.92,24.21 61.92,24.31 50.22,24.31 50.22,38.94 v39.97,38.94
SW2  (via drill 0.35)
  Top 0.305: R13.1 1.89,11.45 SW2.2 1.47,9.32 | J6.09 10.09,7.95 9.67,7.53 9.67,4.43 9.34,4.1 4.73,4.1 4.59,4.23 4.59,8.68 4.25,9.02 v3.81,9.02 | 1.47,9.32 v1.52,9.32 | 1.47,9.32 SW2.1
  Bottom 0.305: v3.81,9.02 1.52,9.02 v1.52,9.32
SWCLK
  Top 0.305: 34,38.01 JP6.1 | 35.85,39.21 R1.2 35.51,38.94 34.64,38.94 34.64,38.01 34,38.01 | U1.45 34,34.87 33.93,34.87 33.93,36.48 34,36.48 34,38.01
SWDIO
  Top 0.305: U1.46 33.5,34.41 33.47,34.41 33.47,35.99 JP6.2
TXD  (1 unrouted)
  Top 0.305: 34.55,44.59 34.55,43.78 38.27,40.06 38.27,36.12 38,35.84 U1.37
TXLED  (via drill 0.35)
  Top 0.305: 37.1,43.16 36.94,43.32 | 36.94,43.32 R9.1 | v37.67,41.87 36.94,42.59 36.94,43.32 | v37.13,36.59 37,36.46 U1.39
  Bottom 0.305: v37.67,41.87 37.13,41.33 v37.13,36.59
VBAT  (via drill 0.35)
  Top 0.305: J3.1 67.17,37.62 66.83,37.29 66.4,37.29 66.4,36.98 | 66.4,36.98 66.4,33.15 C8.1 | 66.4,36.98 D2.A 61.72,36.98 61.72,35.78 59.83,35.78 59.83,32.36 59.55,32.09 59.15,32.09 58.61,31.55 58.61,29.31 v58.4,29.31 | U2.3 54.17,30.62 54.17,29.8 54.59,29.38 v56.4,29.38
  Bottom 0.305: v56.4,29.38 58.4,29.38 v58.4,29.31
VBUS
  Top 0.305: 59.41,38.48 59.41,39.64 | 59.41,39.64 MICRO-USB-B.1 | 59.41,38.48 55.04,38.48 54.59,38.04 CHGR.A | 59.41,39.64 62.05,39.64 62.05,39.81 62.33,39.81 62.33,47.53 52.15,47.53 JP4.1 | U3.3 58.66,34.19 | 58.66,34.19 58.66,36.98 D2.C 59.56,38.48 59.41,38.48 | 58.66,34.19 58.69,34.19 58.69,33.44 55.35,33.44 C5.1 55.35,33.22 U2.4
(copper drawn outside any net)
  shapes: Bottom area x1, Top area x1

## Text on the board
tNames: Rx | GND | Tx | SDA | SCL | GND | 3.3 | VBUS | + | + | - | - | + | D2 | 3.3 | GND | - | - | D5 | A4 | D+ | A5 | D- | - | - | + | D6 | D9 | D13 | D0 | A5 | A4 | DIO | CLK | Reset | - | + | A0 | YELLOWSTONE | A1 | - | + | A2 | - | A3 | Designed by: / Mike Walach / MSGC 2026 | MISO | MOSI | SCK | D1 | D11 | D12 | 900Mhz | LoRa | SW2 | SW2 | AREF
bNames: YELLOWSTONE / Your Experimental Low-Orbit Wireless NanoSatellite for / Telemetry & Operations in Near-space Environments | Mike Walach / 2026